# EAGLE board JACart (EAGLE 9.6.2)

Size 101.6 x 109.22 mm. Coordinates in mm from the lower left corner, seen from the top.
Outline: 0,0 0,109.22 101.6,109.22 101.6,0 0,0
Copper layers (1*16): Top 0.035mm / dielectric 1.5mm / Bottom 0.035mm
Design rules "default": minimum track width 6mil, minimum drill 0.35mm, track to track 6mil, track to pad 6mil, pad to pad 6mil, via to via 6mil, smd to smd 6mil, copper to edge 40mil, drill to drill 6mil, minimum pad ring 10mil, minimum via ring 8mil, stop-mask expansion 4mil, vias tented up to drill 0mil, thermal gap 10mil

## Footprints (pad centres in the part's own frame; a part is rotated, then mirrored left to right if it is on the bottom)
C050-024X044 = drill 0.813 octagon: 1 -2.54,0; 2 2.54,0
CPOL-RADIAL-2.5MM-5MM = drill 0.7 pad 1.651 square: 1 1.25,0 | drill 0.7 pad 1.651: 2 -1.25,0
PANASONIC_A = smd 2 x 1.5: + 1.3,0; - -1.3,0
CAP-PTH-SMALL-KIT = drill 1.016 pad 2.032: 1 -1.397,0; 2 1.397,0
DO35-7 = drill 0.813 long: A 3.81,0; C -3.81,0
78XXS = drill 1.016 long: GND 0,-2.54; IN -2.54,-2.54; OUT 2.54,-2.54
ARDNANO30NP = drill 1.11 pad 1.665 square: 1 0,0 | drill 1.11 pad 1.665: 2 0,-2.54; 3 0,-5.08; 4 0,-7.62; 5 0,-10.16; 6 0,-12.7; 7 0,-15.24; 8 0,-17.78; 9 0,-20.32; 10 0,-22.86; 11 0,-25.4; 12 0,-27.94; 13 0,-30.48; 14 0,-33.02; 15 0,-35.56; 16 15.24,0; 17 15.24,-2.54; 18 15.24,-5.08; 19 15.24,-7.62; 20 15.24,-10.16; 21 15.24,-12.7; 22 15.24,-15.24; 23 15.24,-17.78; 24 15.24,-20.32; 25 15.24,-22.86; 26 15.24,-25.4; 27 15.24,-27.94; 28 15.24,-30.48; 29 15.24,-33.02; 30 15.24,-35.56 | drill 1.778 pad 2.667: MH1 0,2.54; MH2 0,-38.1; MH3 15.24,-38.1; MH4 15.24,2.54
DIP794W56P254L1905H533Q14N = drill 0.759 pad 1.159 square: 1 -3.969,7.62 | drill 0.759 pad 1.159: 2 -3.969,5.08; 3 -3.969,2.54; 4 -3.969,0; 5 -3.969,-2.54; 6 -3.969,-5.08; 7 -3.969,-7.62; 8 3.969,-7.62; 9 3.969,-5.08; 10 3.969,-2.54; 11 3.969,0; 12 3.969,2.54; 13 3.969,5.08; 14 3.969,7.62
39-30-1060_1 = drill 1.85 pad 2.8: 1 4.2,7.3; 2 0,7.3; 3 -4.2,7.3; 4 4.2,12.8; 5 0,12.8; 6 -4.2,12.8 | hole 3.05: 4.2,0; -4.2,0
GLX-S-88M = drill 0.9 pad 1.422: 1 -3.57,-2.3; 2 -2.55,-4.84; 3 -1.53,-2.3; 4 -0.51,-4.84; 5 0.51,-2.3; 6 1.53,-4.84; 7 2.55,-2.3; 8 3.57,-4.84 | drill 1.6 pad 2.184: S1 -8.125,-4.84; S2 8.125,-4.84 | hole 2.55: -7.44,0; 7.44,0
1X06_ROUND_70 = drill 1 pad 1.778: 1 -6.35,0; 2 -3.81,0; 3 -1.27,0; 4 1.27,0; 5 3.81,0; 6 6.35,0
RELAY_JS1-5V-F = drill 1.3: 1 -8.7,0; 2 -6.7,-6; 3 5.5,-6; 4 5.5,6; 5 -6.7,6
LED_5MM = drill 0.813 pad 1.88: A -1.27,0; K 1.27,0
DIL04 = drill 0.813 offset: 1 -1.27,-3.81; 2 1.27,-3.81; 3 1.27,3.81; 4 -1.27,3.81
TO92 = drill 0.813 octagon: 1 1.27,0; 2 0,1.905; 3 -1.27,0
AXIAL-0.3 = drill 0.9 pad 1.88: P$1 -3.81,0; P$2 3.81,0
RJ9W = drill 0.813 long: A 2.54,0.635; E -2.54,0.635; S 0,0.635
DIOAD950W60L350D150 = drill 0.8 pad 1.2 square: 1 0,0 | drill 0.8 pad 1.2: 2 9.5,0

## Placement (x,y rotation side)
C1  0.1uF  [C050-024X044]  17.78,102.87 270 top
C2  0.33uF  [C050-024X044]  17.78,95.25 90 top
C3  10uF  [CPOL-RADIAL-2.5MM-5MM]  58.42,25.4 270 top
C4  330uF  [PANASONIC_A]  69.85,68.58 180 top
C5  330uF  [PANASONIC_A]  69.85,60.96 180 top
C6  0.1uF  [C050-024X044]  64.77,25.4 90 top
C7  1.0uF  [CAP-PTH-SMALL-KIT]  77.47,90.17 0 top
D1  1N4148  [DO35-7]  52.07,44.45 270 top
D2  1N4148  [DO35-7]  52.07,97.79 270 top
D3  1N4148  [DO35-7]  52.07,81.28 270 top
D4  1N4148  [DO35-7]  52.07,63.5 270 top
D5  1N4148  [DO35-7]  52.07,26.67 270 top
D6  1N4148  [DO35-7]  52.07,10.16 270 top
IC1  LM7805  [78XXS]  10.16,100.33 90 top
IC2  ARD-NANO30NP  [ARDNANO30NP]  59.69,3.81 90 top
IC3  LMC6484IN  [DIP794W56P254L1905H533Q14N]  86.36,82.55 270 top
J1  39-30-1060  [39-30-1060_1]  8.89,72.39 270 top
J3  Steering  [GLX-S-88M]  8.89,11.43 90 top
J4  Brake  [GLX-S-88M]  8.89,31.75 90 top
J5  Throttle  [GLX-S-88M]  8.89,52.07 90 top
JP1  MCP4725  [1X06_ROUND_70]  72.39,31.75 90 top
JP2  MCP4725  [1X06_ROUND_70]  72.39,49.53 90 top
K1  Brake(1)  [RELAY_JS1-5V-F]  36.83,10.16 180 top
K2  Brake(2)  [RELAY_JS1-5V-F]  36.83,27.94 180 top
K3  Throttle(3)  [RELAY_JS1-5V-F]  36.83,63.5 180 top
K4  Throttle(4)  [RELAY_JS1-5V-F]  36.83,81.28 180 top
K5  Throttle  [RELAY_JS1-5V-F]  36.83,99.06 180 top
K6  Brake  [RELAY_JS1-5V-F]  36.83,45.72 180 top
LED1  Brake  [LED_5MM]  60.96,33.02 180 top
LED2  Throttle  [LED_5MM]  60.96,87.63 180 top
LED3  Auto  [LED_5MM]  7.62,86.36 180 top
OK1  PC817  [DIL04]  60.96,49.53 0 top
OK2  PC817  [DIL04]  60.96,72.39 0 top
Q1  [TO92]  53.34,54.61 180 top
Q2  [TO92]  58.42,97.79 270 top
Q3  [TO92]  63.5,97.79 270 top
R1  510  [AXIAL-0.3]  60.96,58.42 0 top
R2  470  [AXIAL-0.3]  60.96,40.64 180 top
R3  510  [AXIAL-0.3]  60.96,80.01 0 top
R4  470  [AXIAL-0.3]  60.96,64.77 0 top
R5  220  [AXIAL-0.3]  74.93,64.77 270 top
R6  220  [AXIAL-0.3]  77.47,64.77 270 top
R7  470  [AXIAL-0.3]  19.05,86.36 180 top
R8  1M  [AXIAL-0.3]  88.9,93.98 0 top
R9  470  [AXIAL-0.3]  77.47,104.14 0 top
R10  TBD  [AXIAL-0.3]  77.47,100.33 0 top
R11  10k  [AXIAL-0.3]  88.9,97.79 0 top
R12  10k  [AXIAL-0.3]  88.9,90.17 0 top
R13  220  [AXIAL-0.3]  87.63,72.39 0 top
R14  10k  [AXIAL-0.3]  87.63,74.93 180 top
R15  1k  [RJ9W]  88.9,102.87 180 top
R16  100  [AXIAL-0.3]  77.47,96.52 0 top
R17  1k  [AXIAL-0.3]  77.47,92.71 0 top
R18  1k  [AXIAL-0.3]  68.58,97.79 90 top
Z1  BAT85S-TR  [DIOAD950W60L350D150]  68.58,77.47 90 top
Z2  BAT85S-TR  [DIOAD950W60L350D150]  72.39,77.47 90 top

## Library data of the parts
C1 C2 C4 C5 D1-D6 IC1 LED1-LED3 Q1-Q3 R1-R14 R16-R18 = JACartParts
C3 = JACartParts; PROD_ID: CAP-08440
C6 = JACartParts; C6: 0.1uF
C7 = JACartParts; PROD_ID: CAP-08370
IC2 = samacsys; DESCRIPTION: Development Boards & Kits - AVR Arduino Nano 3.1 W/ATMEGA328 NO-PIN; HEIGHT: 5mm; MANUFACTURER_NAME: Gravitech; MANUFACTURER_PART_NUMBER: ARD-NANO30NP; MOUSER_PART_NUMBER: 992-ARD-NANO30NP; MOUSER_PRICE-STOCK: https://www.mouser.co.uk/ProductDetail/Gravitech/ARD-NANO30NP?qs=Vxac6xGyzPlh7in3DWNTbQ%3D%3D
IC3 = JACartParts; DESCRIPTION: OP Amps; HEIGHT: 5.334mm; MANUFACTURER_NAME: Texas Instruments; MANUFACTURER_PART_NUMBER: LMC6484IN; MOUSER_PART_NUMBER: 926-LMC6484IN; MOUSER_PRICE-STOCK: https://www.mouser.com/Search/Refine.aspx?Keyword=926-LMC6484IN
J1 = JACartParts; DESCRIPTION: 6 way r/a PCB header w/peg,Mini-Fit Jr Molex MINI-FIT JR. Series, Series Number 5569, 4.2mm Pitch 6 Way 2 Row Shrouded Right Angle PCB Header, Through Hole; HEIGHT: mm; MANUFACTURER_NAME: Molex; MANUFACTURER_PART_NUMBER: 39-30-1060; MOUSER_PART_NUMBER: 538-39-30-1060; MOUSER_PRICE-STOCK: https://www.mouser.co.uk/ProductDetail/Molex/39-30-1060?qs=tRPrwvvr%2FujbUr18ehTIWQ%3D%3D
J3 J5 = JACartParts; OC_FARNELL: unknown; OC_NEWARK: unknown
J4 = JACartParts; MF: J4; OC_FARNELL: unknown; OC_NEWARK: unknown
JP1 JP2 = microbuilder
K1-K6 = JACartParts; AVAILABILITY: Good; DESCRIPTION: General Purpose Relay SPDT (1 Form C) 5VDC Coil Through Hole; MF: Panasonic Electric; MP: JS1-5V-F; PACKAGE: DO-41 Panasonic; PRICE: None; PURCHASE-URL: https://pricing.snapeda.com/search/part/JS1-5V-F/?ref=eda
OK1 OK2 = JACartParts; MPN: PC817X4J000F; OC_FARNELL: 9707727; OC_NEWARK: 97K7059
R15 = pot
Z1 Z2 = samacsys; ARROW_PART_NUMBER: BAT85S-TR; ARROW_PRICE-STOCK: https://www.arrow.com/en/products/bat85s-tr/vishay; DESCRIPTION: Schottky Diodes & Rectifiers 200mA 30 Volt 5.0 Amp IFSM; HEIGHT: mm; MANUFACTURER_NAME: Vishay; MANUFACTURER_PART_NUMBER: BAT85S-TR; MOUSER_PART_NUMBER: 78-BAT85S; MOUSER_PRICE-STOCK: https://www.mouser.co.uk/ProductDetail/Vishay-Semiconductors/BAT85S-TR?qs=WLTup5mM6hhXwTYgVHMF2g%3D%3D

## Nets
5V: C1.1 C3.1 C6.1 D1.C D2.C IC1.OUT IC2.19 J1.2 J1.5 J3.2 JP1.1 JP2.1 JP2.5 K5.2 K6.2 OK1.4 OK2.4
AUTO: D3.C D4.C D5.C D6.C J1.3 K1.2 K2.2 K3.2 K4.2 R7.P$1
BKA: IC2.11 R2.P$2
BRKSIG: K1.3 Z1.1 Z2.1
GND: C1.2 C2.2 C3.2 C4.- C5.- C6.2 D3.A D4.A D5.A D6.A IC1.GND IC2.4 IC2.17 IC3.11 J1.1 J3.3 J4.3 J5.3 JP1.2 JP2.2 K1.5 K2.5 K3.5 K4.5 LED1.K LED2.K LED3.K Q1.3 Q2.3 Q3.3 R9.P$1 R13.P$1 R15.A
N$1: C2.1 IC1.IN J1.4
N$2: D1.A K6.5 Q1.1
N$3: OK2.1 R4.P$1
N$4: LED3.A R7.P$2
N$5: OK2.3 R3.P$2
N$6: Q2.2 Q3.1 R3.P$1
N$7: OK1.1 R2.P$1
N$8: LED2.A OK2.2
N$9: LED1.A OK1.2
N$10: IC2.9 R6.P$2
N$11: IC2.8 R5.P$2
N$12: OK1.3 R1.P$2
N$13: Q1.2 R1.P$1
N$14: D2.A K5.5 Q2.1
N$15: J5.4 K3.4
N$16: R9.P$2 R10.P$2 R12.P$1 R16.P$2
N$17: K2.3 K6.3
N$18: K4.3 K5.3
N$19: J5.7 K5.1
N$20: J5.8 K4.1
N$21: J5.2 K4.4
N$22: J5.6 K3.1
N$23: J4.7 K6.1
N$24: J4.8 K2.1
N$25: J4.2 K2.4
N$26: J4.6 K1.1
N$27: J4.4 K1.4
N$28: IC3.1 R8.P$2 R12.P$2
N$29: IC3.2 R8.P$1 R11.P$1
N$30: IC3.5 IC3.13 IC3.14 R16.P$1
N$31: IC3.12 R13.P$2 R14.P$1
N$32: R11.P$2 R15.S
N$33: IC3.6 R10.P$1 R17.P$2
N$34: C7.1 IC3.7 Z2.2
N$35: C7.2 R17.P$1
N$36: C5.+ R6.P$1 Z1.2
N$37: Q3.2 R18.P$1
PANIC: IC2.5 IC3.4 J1.6 R14.P$2 R15.E R18.P$2
POTWPR: IC2.27 J3.1
SCL: IC2.22 JP1.3 JP2.3
SDA: IC2.23 JP1.4 JP2.4
STRLFT: IC2.13 J3.8 JP2.6
STRRT: IC2.12 J3.7 JP1.6
TLA: IC2.10 R4.P$2
TTLSIG: C4.+ K3.3 R5.P$1

## Tracks (layer width: path | path; a pad name or v marks a point on that pad's centre or on a via)
5V  (16 unrouted)
AUTO  (9 unrouted)
BKA  (1 unrouted)
BRKSIG  (2 unrouted)
GND  (32 unrouted)
N$1  (2 unrouted)
N$2  (2 unrouted)
N$3  (1 unrouted)
N$4  (1 unrouted)
N$5  (1 unrouted)
N$6  (2 unrouted)
N$7  (1 unrouted)
N$8  (1 unrouted)
N$9  (1 unrouted)
N$10  (1 unrouted)
N$11  (1 unrouted)
N$12  (1 unrouted)
N$13  (1 unrouted)
N$14  (2 unrouted)
N$15  (1 unrouted)
N$16  (3 unrouted)
N$17  (1 unrouted)
N$18  (1 unrouted)
N$19  (1 unrouted)
N$20  (1 unrouted)
N$21  (1 unrouted)
N$22  (1 unrouted)
N$23  (1 unrouted)
N$24  (1 unrouted)
N$25  (1 unrouted)
N$26  (1 unrouted)
N$27  (1 unrouted)
N$28  (2 unrouted)
N$29  (2 unrouted)
N$30  (3 unrouted)
N$31  (2 unrouted)
N$32  (1 unrouted)
N$33  (2 unrouted)
N$34  (2 unrouted)
N$35  (1 unrouted)
N$36  (2 unrouted)
N$37  (1 unrouted)
PANIC  (5 unrouted)
POTWPR  (1 unrouted)
SCL  (2 unrouted)
SDA  (2 unrouted)
STRLFT  (2 unrouted)
STRRT  (2 unrouted)
TLA  (1 unrouted)
TTLSIG  (2 unrouted)